# Altium PCB PCB.PcbDoc (part 1 of 3)
Units mm, origin at the board's own origin, x right, y up, seen from the top; angles counter-clockwise.
Board outline 224 x 132 mm, 4 copper layers (Top Layer, Signal Layer 1, Signal Layer 2, Bottom Layer), stack 0.778 mm thick; 181 components, 179 nets, 1018 pads, 539 vias.
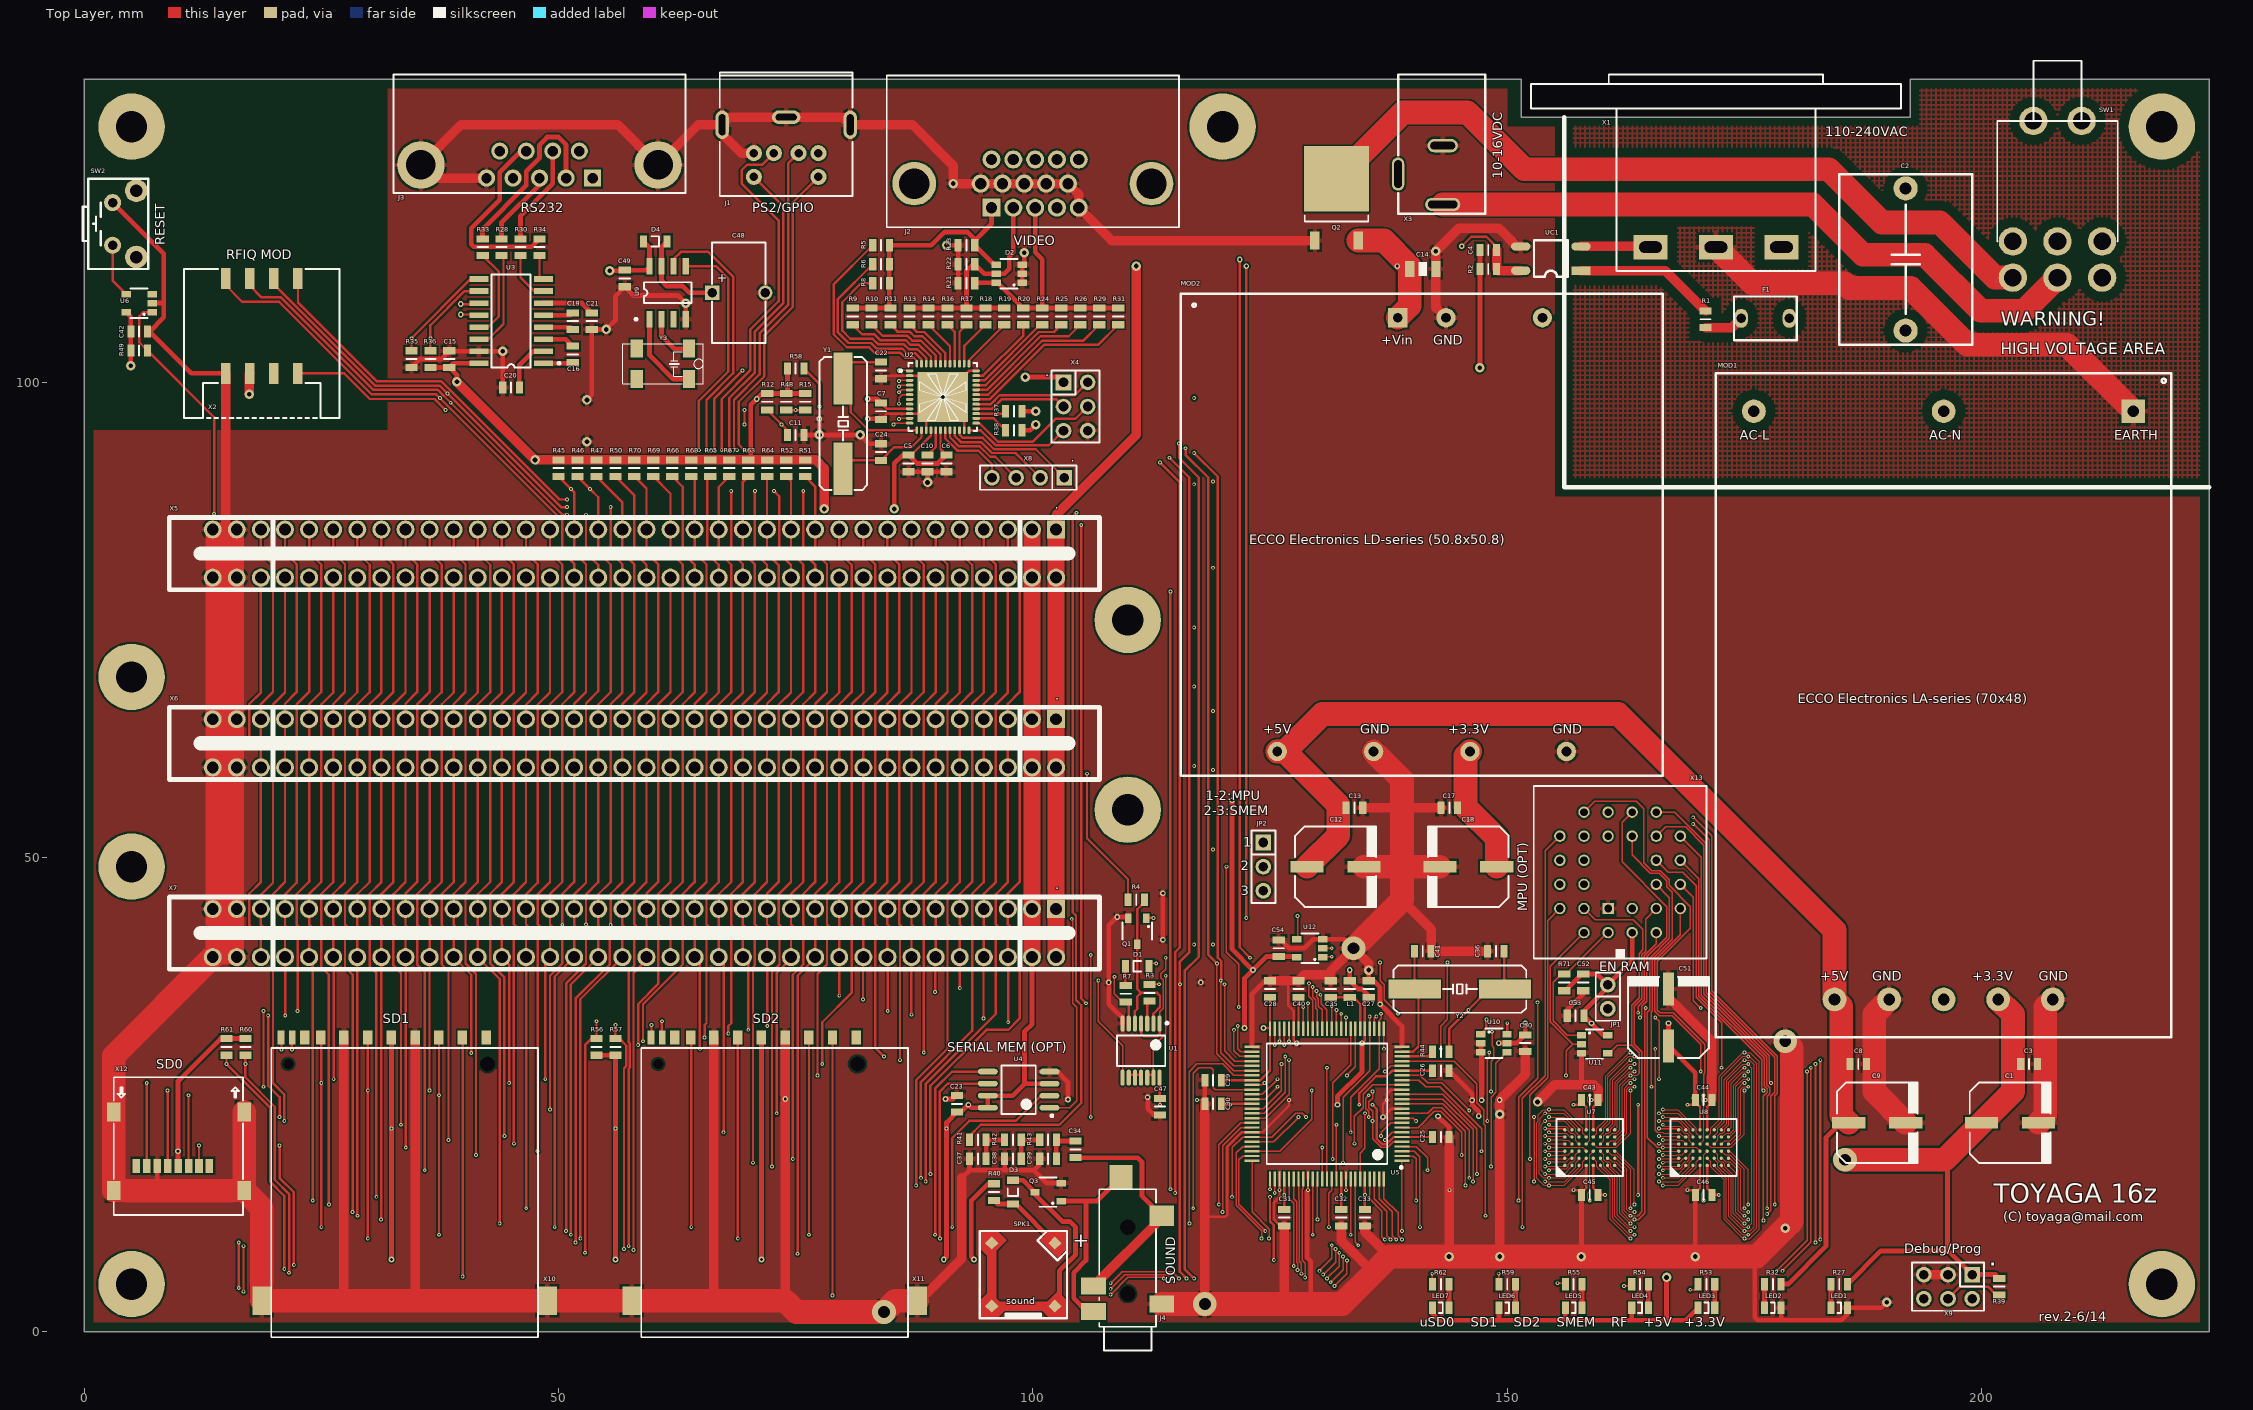
[diagram p0: Top Layer view]
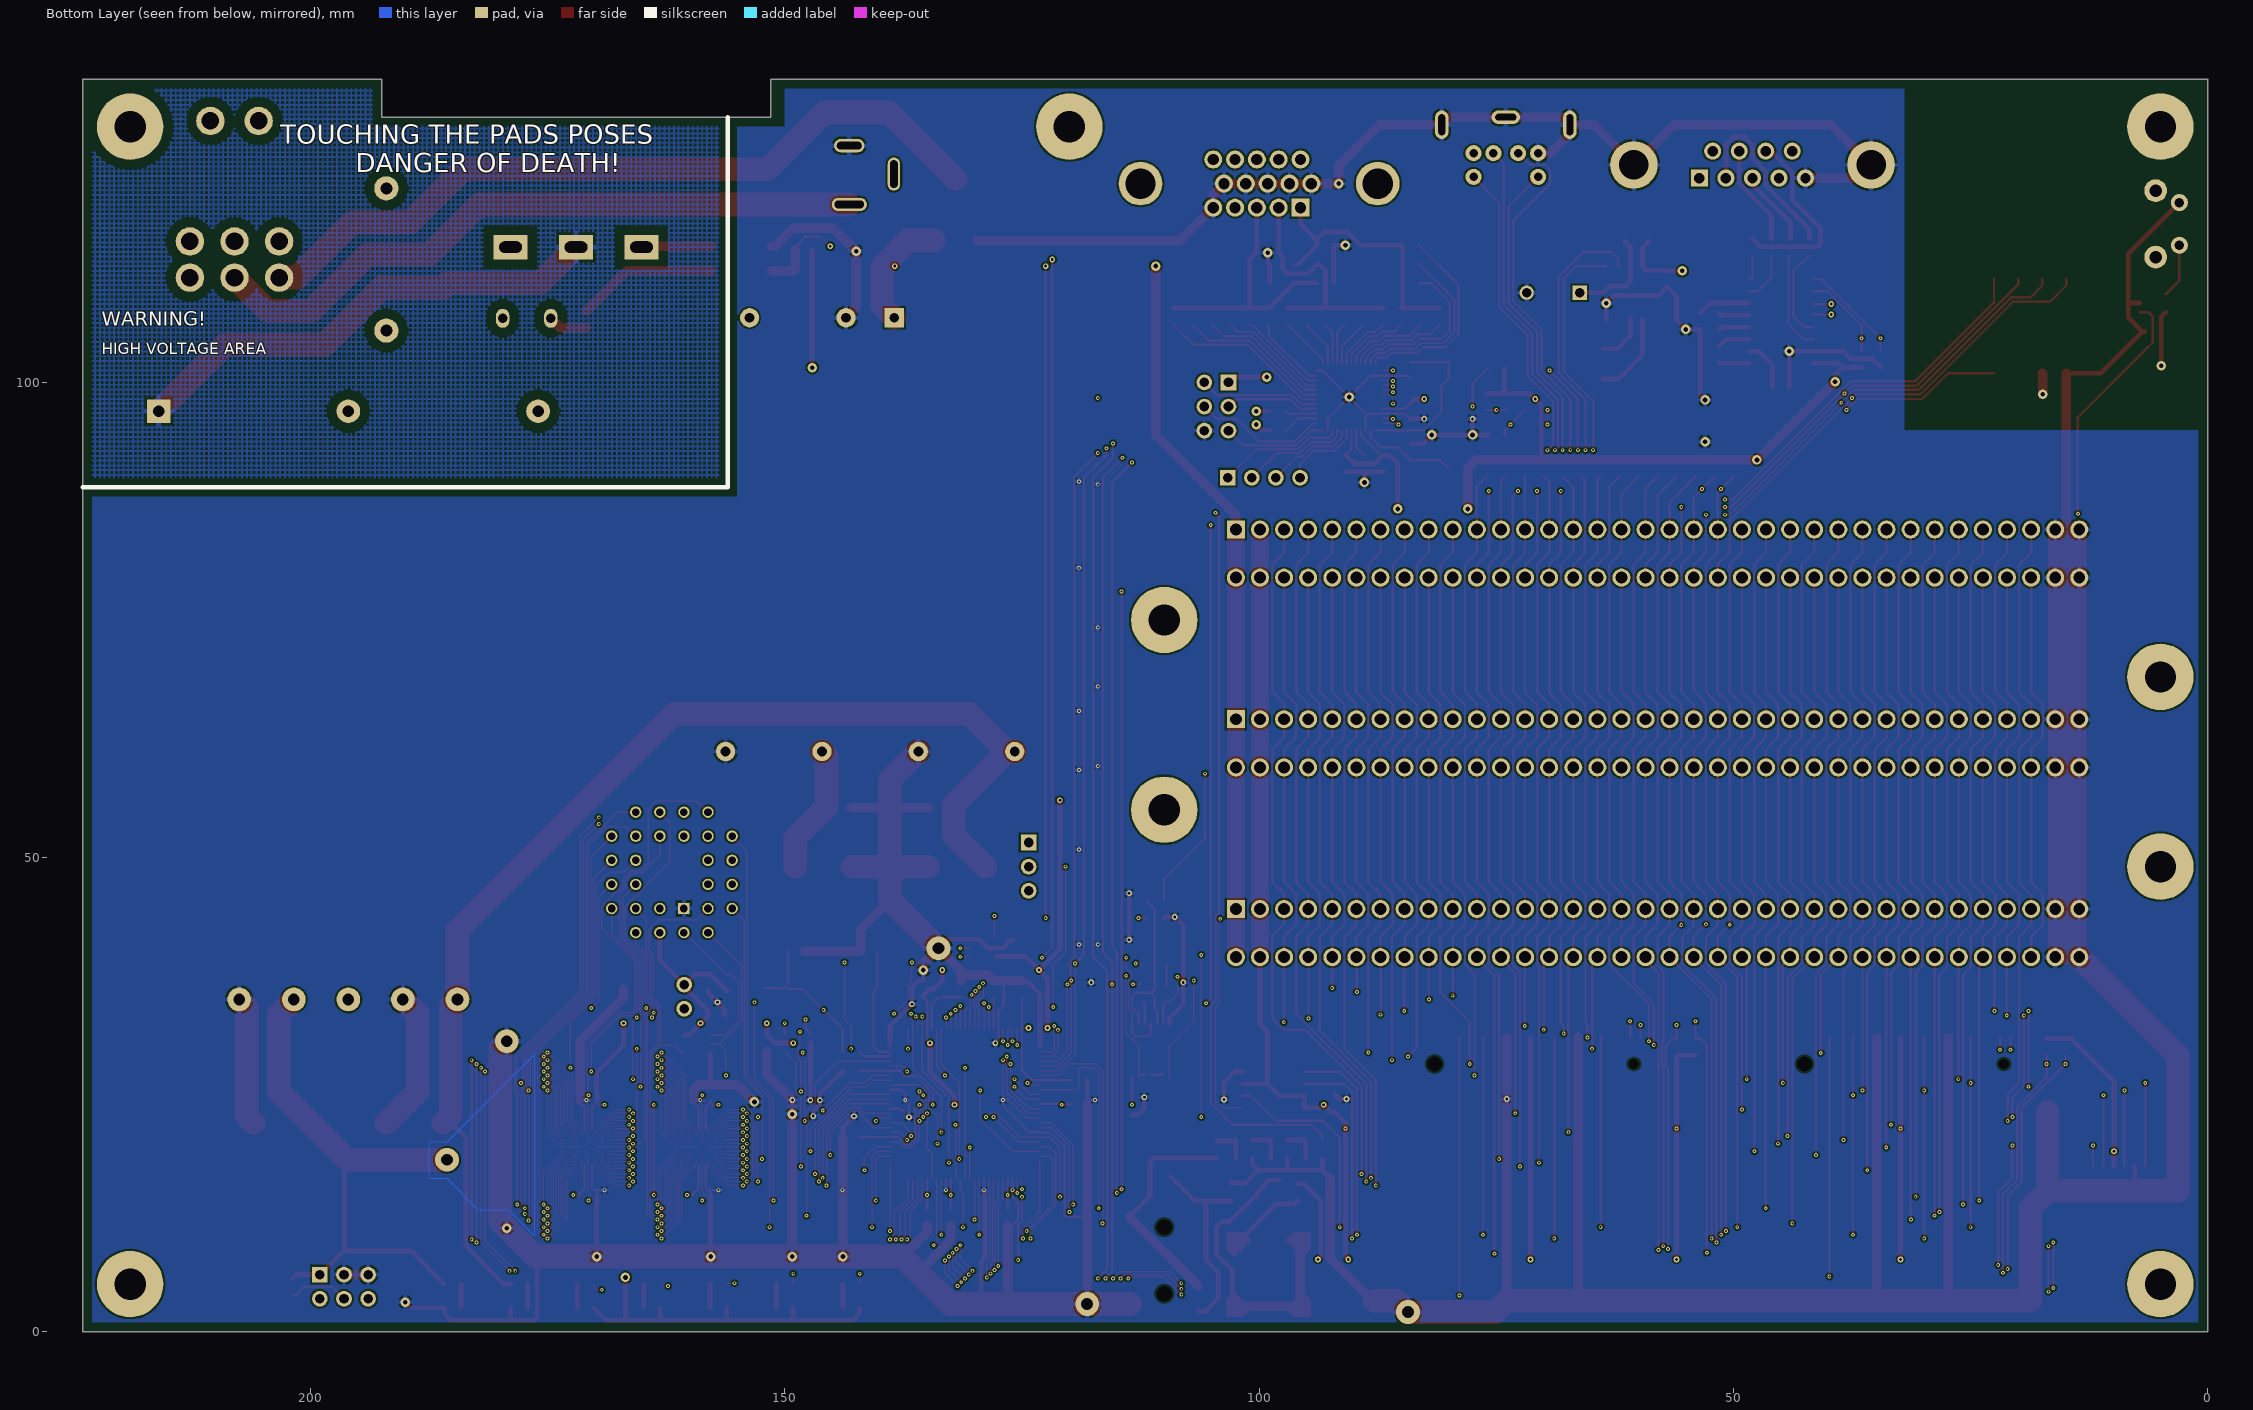
[diagram p1: Bottom Layer view, seen from below]
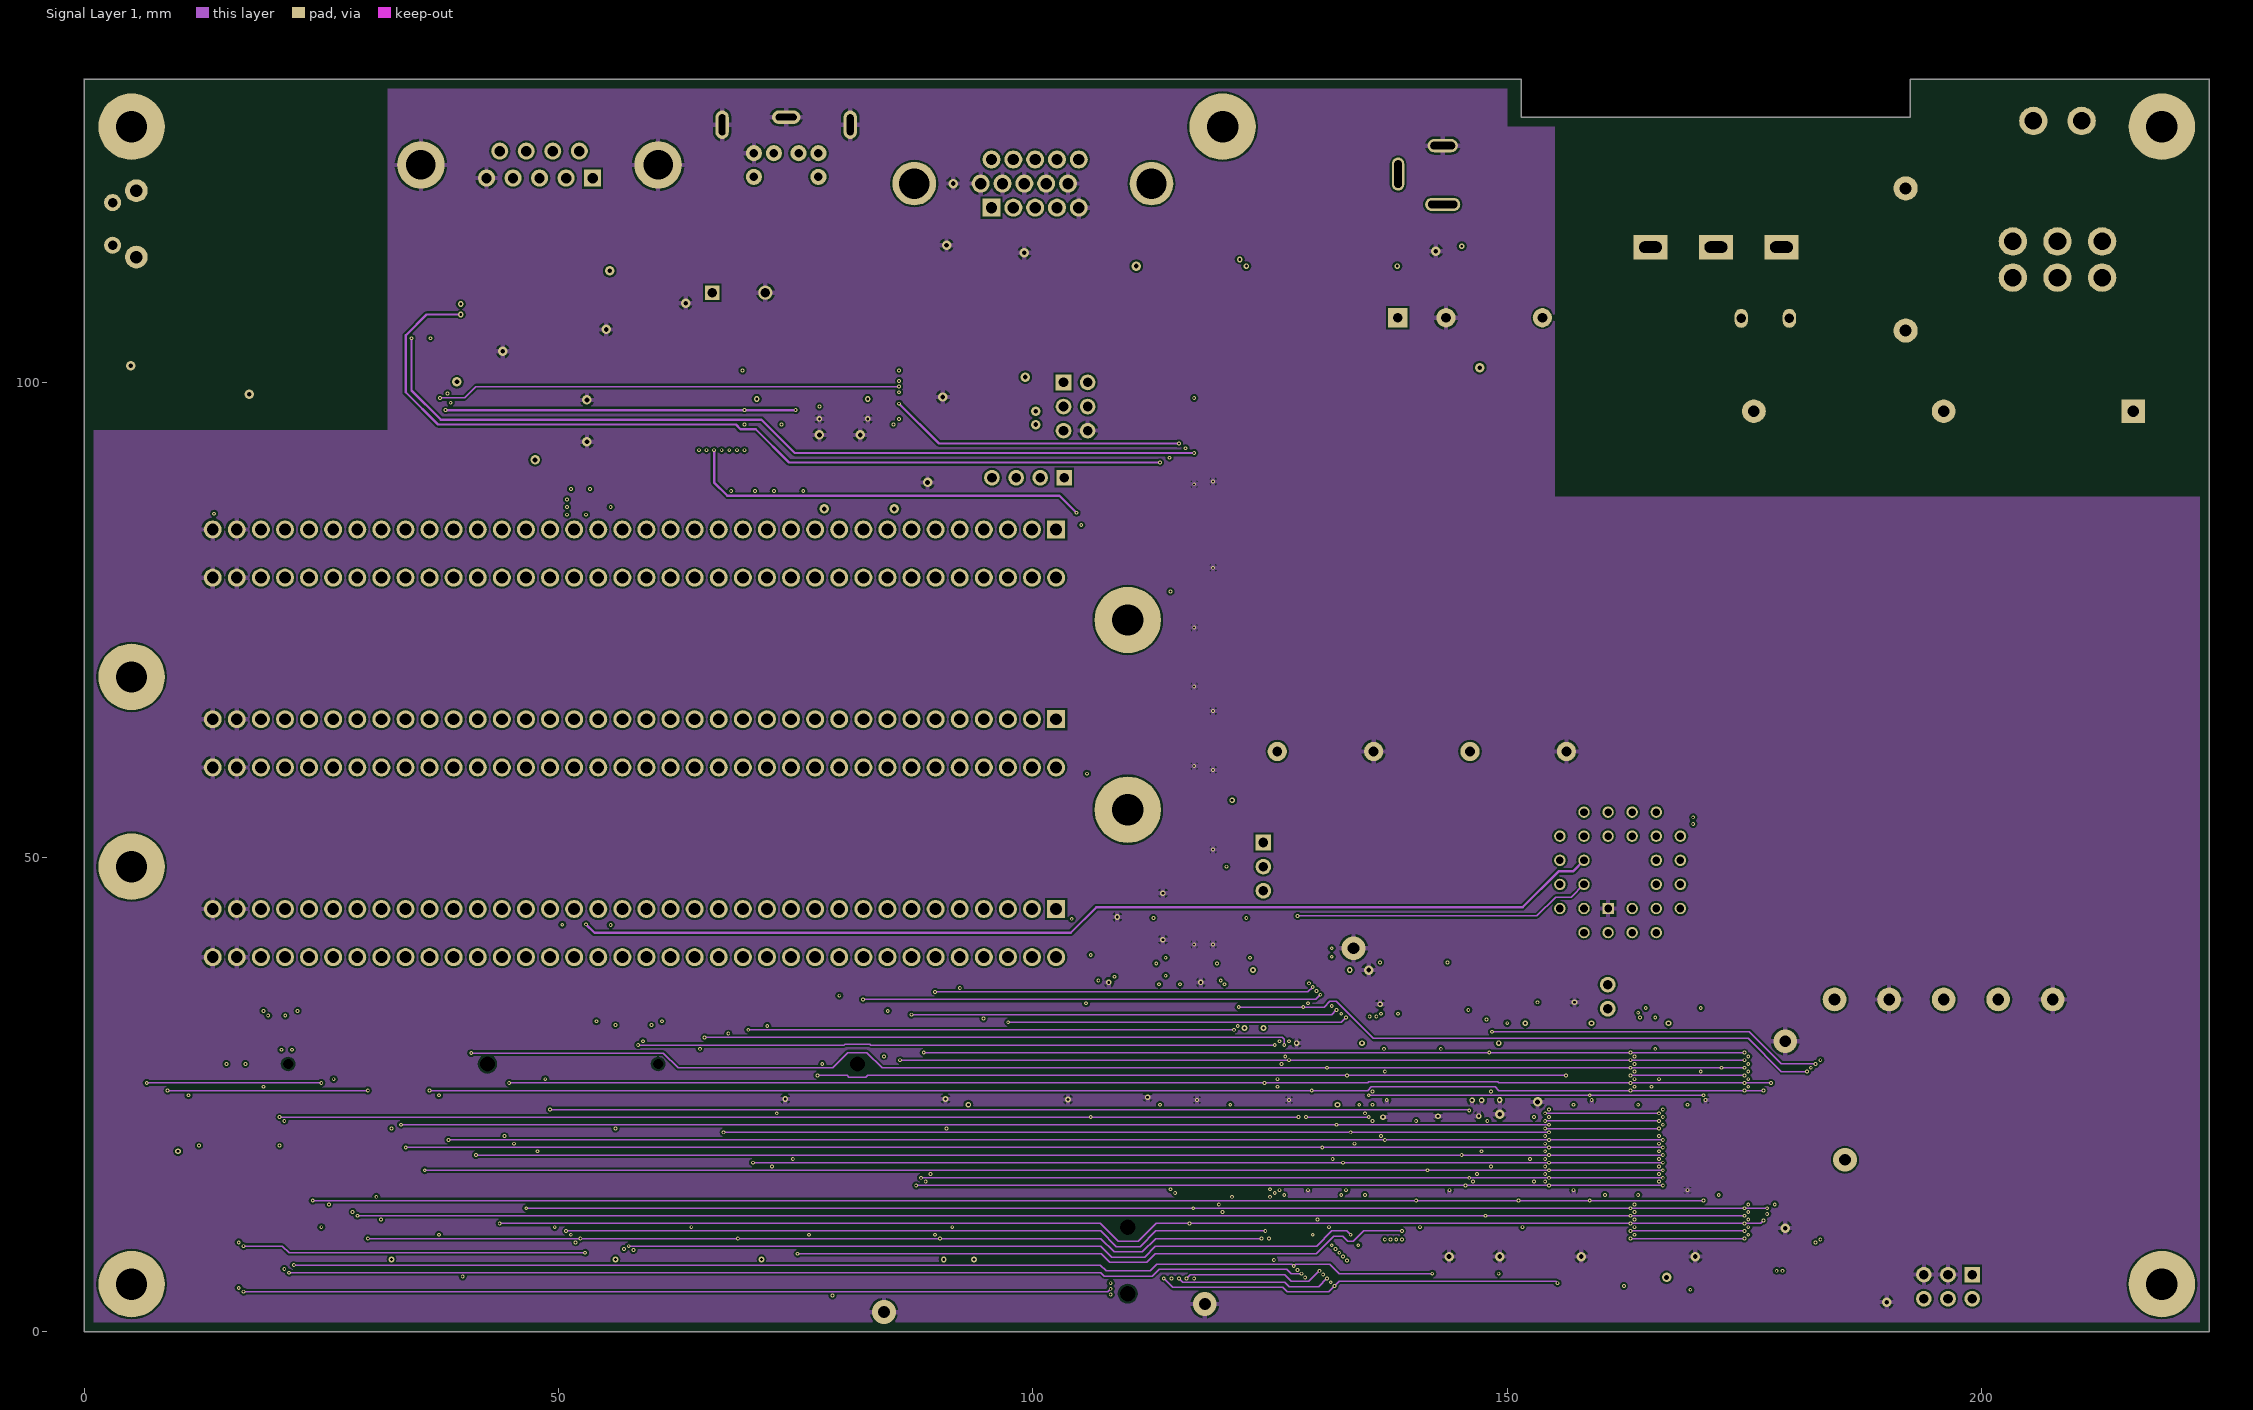
[diagram p2: Signal Layer 1]
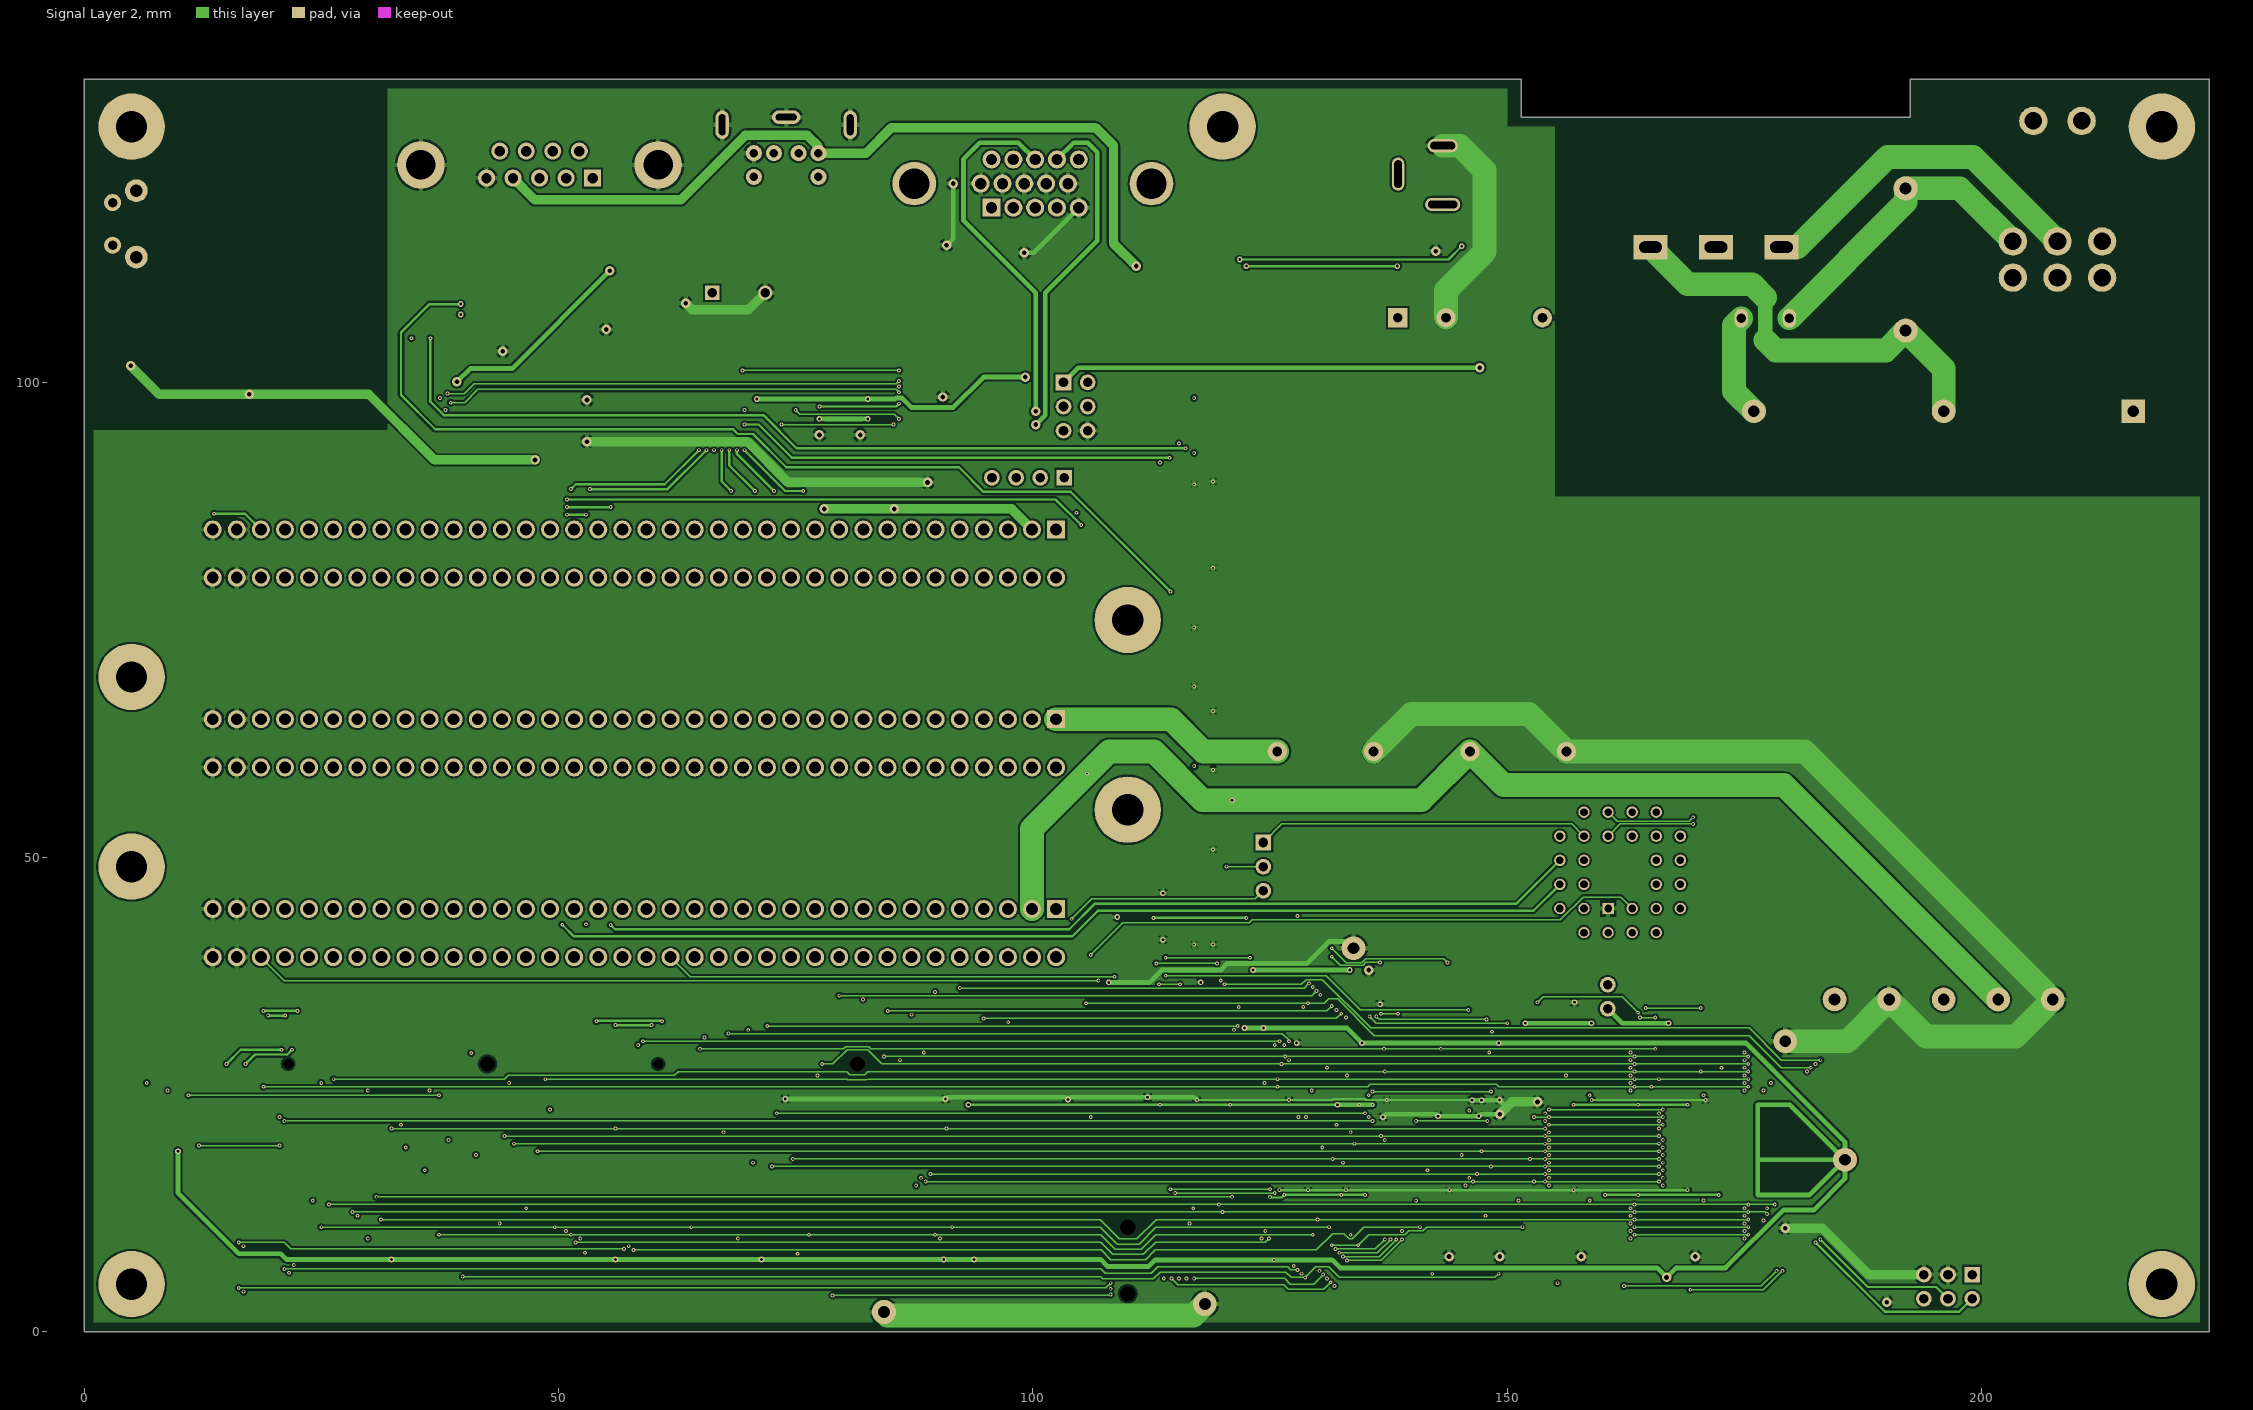
[diagram p3: Signal Layer 2]

## Layer stack, top to bottom
Top Layer: signal copper 0.0356
Dielectric: core 0.254, FR-4, Dk 4.2
Signal Layer 1: signal copper 0.036
Dielectric: prepreg 0.127, FR-4, Dk 4.2
Signal Layer 2: signal copper 0.036
Dielectric: core 0.254, FR-4, Dk 4.2
Bottom Layer: signal copper 0.0356

## Board outline
0,0 0,132 151.5,132 151.5,128 192.5,128 192.5,132 224,132 224,0

## Design rules (kind name [scope] priority, off if disabled: settings)
Clearance Clearance_POLY [IsRegion] p1: gap=0.2
Clearance Clearance_EARTH [InNet('EARTH')] p2: gap=1
Clearance [All] p3: gap=0.125
ComponentClearance [All] p1: gap=0.2 collisioncheckmode=3 verticalgap=0.25 showdistances=FALSE
Height [All] p1: minheight=0 maxheight=100 prefheight=2.5
HoleSize [All] p1: absolutevalues=TRUE maxlimit=25 minlimit=0.025 maxpercent=80.000 minpercent=20.000
HoleToHoleClearance [All] p1: gap=0 allowstackedmicrovias=TRUE
MinimumSolderMaskSliver [All] p1: minsoldermaskwidth=-100
NetAntennae [All] p1: netantennaetolerance=1
PlaneClearance [All] p1: clearance=0.5
PlaneConnect [All] p1: planeconnectstyle=Relief reliefexpansion=0.5 reliefentries=4 reliefconductorwidth=0.25 reliefairgap=0.25
PolygonConnect [All] p1: connectstyle=Relief reliefconductorwidth=0.5 reliefentries=4 polygonreliefangle="90 Angle" airgapwidth=0.25
RoutingVias [All] p1: holewidth=0.3 width=0.6 viastyle="Through Hole" minholewidth=0.15 minwidth=0.3 maxholewidth=2.5 maxwidth=5
SilkToSilkClearance [All] p1: silktosilkclearance=-100
SilkToSolderMaskClearance [IsPad] p1: minsilkscreentomaskgap=-100 clearancetoexposedcopper=TRUE
SolderMaskExpansion [All] p1: expansion=0.102
Width [All] p1: maxlimit=5 minlimit=0.125 preferedwidth=0.25
18 further rules are at their usual default settings.

## Classes and differential pairs
component class Schematic: C1 C2 C3 C4 C5 C6 C7 C8 C9 C10 C11 C12 C13 C14 C15 C16 C17 C18 C19 C20 C21 C22 C24 C25 C26 C27 C28 C29 C30 C31 C32 C33 C34 C35 C36 C37 C38 C39 C40 C41 C42 C43 C44 C45 C46 C47 C48 C49 C50 C51 D1 D2 D3 D4 F1 J1 J2 J3 J4 JP1 L1 LED1 LED2 LED3 LED4 LED5 LED6 LED7 MOD1 MOD2 Q1 Q2 Q3 R1 R2 R3 R4 R5 R6 R7 R8 R9 R10 R11 R12 R13 R14 R15 R16 R17 R18 R19 R20 R21 R22 R23 R24 R25 R26 R27 R28 R29 R30 R31 R32 R33 R34 R35 R36 R37 R38 R39 R40 R41 R42 R43 R44 R45 R46 R47 R48 R49 R50 R51 R52 R53 R54 R55 R56 R57 R58 R59 R60 R61 R62 R63 R64 R65 R66 R67 R68 R69 R70 SPK1 SW1 SW2 U1 U2 U3 U5 U6 U7 U8 U9 U10 UC1 X1 X3 X4 X5 X6 X7 X8 X9 X10 X11 X12 Y1 Y2 Y3
component class Additions: C23 C52 C53 C54 JP2 R71 U4 U11 U12 X2 X13

## Components (designator, comment, footprint, x,y, rotation, side; value= is the part's Value field where it differs from the comment)
C1 "470u/16V" "8.5 x 8.5" 203,22 r180 top locked
C2 "R46KI3330" X2_15MM 192,113 r270 top locked
C3 "100n" _0805 205,28.2 r180 top locked
C4 "4n7" _0805 148,114 r180 top locked
C5 "4u7" _0805 86.9,91.5 r270 top locked
C6 "4u7" _0805 90.9,91.5 r270 top locked
C7 "1u" _0805 84,97 r270 top locked
C8 "100n" _0805 187,28.2 r0 top locked
C9 "470u/16V" "8.5 x 8.5" 189,22 r180 top locked
C10 "4u7" _0805 88.9,91.5 r270 top locked
C11 "100n" _0805 75,94.5 r0 top locked
C12 "470u/16V" "8.5 x 8.5" 131.9,49 r180 top locked
C13 "100n" _0805 133.9,55.2 r0 top locked
C14 "1u/50V" _1206 141.1,112 r0 top
C15 "1u" _0805 38.5,102.5 r90 top locked
C16 "1u" _0805 51.5,103 r90 top locked
C17 "100n" _0805 143.9,55.2 r0 top locked
C18 "470u/16V" "8.5 x 8.5" 145.9,49 r0 top
C19 "1u" _0805 51.5,106.5 r270 top locked
C20 "1u" _0805 45,99.5 r0 top locked
C21 "1u" _0805 53.5,106.5 r90 top locked
C22 "27p" _0805 84,101.3 r270 top locked
C23 "100n" _0805 92,24 r90 top locked
C24 "27p" _0805 84,92.7 r90 top locked
C25 "100n" _0805 143,20.5 r180 top locked
C26 "100n" _0805 143,27.5 r180 top locked
C27 "100n" _0805 135.4,36.1 r270 top locked
C28 "100n" _0805 125,36.1 r270 top locked
C29 "100n" _0805 119,26.5 r0 top locked
C30 "100n" _0805 119,24 r0 top locked
C31 "100n" _0805 126.5,12 r90 top locked
C32 "100n" _0805 132.5,12 r90 top locked
C33 "100n" _0805 135,12 r90 top locked
C34 "470n" _0805 104.5,19.2 r270 top locked
C35 "1u" _0805 131.4,36.1 r270 top locked
C36 "18p" _0805 148.8,40.1 r180 top
C37 "4n7" _0805 94.2,18.2 r0 top locked
C38 "4n7" _0805 97.9,18.2 r0 top locked
C39 "4n7" _0805 101.6,18.2 r0 top locked
C40 "10u" _0805 128,36.1 r270 top locked
C41 "18p" _0805 141.1,40.1 r0 top
C42 "100n" _0805 5.8,105.4 r0 top locked
C43 "100n" _0805 158.7,24.4 r0 top locked
C44 "100n" _0805 170.7,24.4 r0 top locked
C45 "100n" _0805 158.7,14.4 r180 top locked
C46 "100n" _0805 170.7,14.4 r180 top locked
C47 "100n" _0805 113.4,23.7 r270 top
C48 "EECS0HD334V" "D10.5 x L5.5" 69,109.5 r0 top locked
C49 "100n" _0805 57,111 r270 top locked
C50 "100n" _0805 151.9,30.4 r90 top
C51 "470u/16V" "8.5 x 8.5" 167,33.1 r270 top locked
C52 "100n" _0805 158,36.8 r270 top
C53 "100n" _0805 157.2,33.3 r180 top
C54 "100n" _0805 125.9,40.4 r270 top
D1 "BAT54WS" "SOD-323 (MicroMELF)" 111,38.5 r0 top
D2 "BAS21VD" SOT23-6 97.5,111.5 r90 top locked
D3 "BAT54WS" "SOD-323 (MicroMELF)" 97.9,14.7 r90 top locked
D4 "RB751V40T1G" "SOD-323 (MicroMELF)" 60.2,114.9 r180 top locked
F1 "TRF600-150-2" "Fuse 5.1mm pitch" 177.2,106.8 r180 top locked
J1 "MD-60SM" MD-60SM 74,132.7 r0 top locked
J2 "TE1734530" "DB15F R/A VGA" 100,121 r180 top locked
J3 "DB9-M" "DB9M R/A" 48,123 r0 top locked
J4 "STX-3500-5N" STX-3500 110,0.5 r180 top locked
JP1 "SIL2-M" 2011-1X02S 160.6,35.3 r270 top
JP2 "Jumper 3" 2011-1X03S 124.3,49 r270 top
L1 "FR120R" _0805 133.4,36.1 r90 top locked
LED1 "0805GRN" _0805+ 185,2.5 r180 top locked
LED2 "0805GRN" _0805+ 178,2.5 r180 top locked
LED3 "0805BLU" _0805+ 171,2.5 r180 top locked
LED4 "0805YLW" _0805+ 164,2.5 r180 top locked
LED5 "0805YLW" _0805+ 157,2.5 r180 top
LED6 "0805YLW" _0805+ 150,2.5 r180 top
LED7 "0805RED" _0805+ 143,2.5 r180 top locked
MOD1 "LA25-220S3.3S05" "ECCO AC-DC (70x48)" 172,101 r270 top locked
MOD2 "LD25-12S05S3.3" "DC-DC (50.8x50.8)" 141,84 r270 top locked
Q1 "MMUN2233" SOT23-3 111,42.2 r180 top
Q2 "DMP4015SK3" TO252-3N 132,119.5 r90 top locked
Q3 "MMUN2233" SOT23-3 101.6,14.7 r90 top locked
R1 "470k" _0805 170.9,106.7 r90 top locked
R2 "100k" _0805 148,112 r180 top locked
R3 "10k" _0805 112.3,35.7 r90 top
R4 "100k" _0805 110.9,45.5 r0 top
R5 "15k" _0805 84,114.5 r0 top locked
R6 "8k2" _0805 84,112.5 r0 top locked
R7 "1k" _0805 109.8,35.6 r90 top
R8 "3k9" _0805 84,110.5 r0 top locked
R9 "2k" _0805 81,107 r90 top locked
R10 "1k" _0805 83,107 r90 top locked
R11 "470R" _0805 85,107 r90 top locked
R12 "10k" _0805 72,98 r270 top locked
R13 "15k" _0805 87,107 r90 top locked
R14 "8k2" _0805 89,107 r90 top locked
R15 "10k" _0805 76,98 r90 top locked
R16 "3k9" _0805 91,107 r90 top locked
R17 "2k" _0805 93,107 r90 top locked
R18 "1k" _0805 95,107 r90 top locked
R19 "470R" _0805 97,107 r90 top locked
R20 "15k" _0805 99,107 r90 top locked
R21 "75R" _0805 93,110.5 r0 top locked
R22 "75R" _0805 93,112.5 r0 top locked
R23 "75R" _0805 93,114.5 r0 top locked
R24 "8k2" _0805 101,107 r90 top locked
R25 "3k9" _0805 103,107 r90 top locked
R26 "2k" _0805 105,107 r90 top locked
R27 "510R" _0805 185,5 r0 top locked
R28 "330R" _0805 44,114.3 r90 top locked
R29 "1k" _0805 107,107 r90 top locked
R30 "330R" _0805 46,114.3 r90 top locked
R31 "470R" _0805 109,107 r90 top locked
R32 "820R" _0805 178,5 r0 top locked
R33 "330R" _0805 42,114.3 r90 top locked
R34 "330R" _0805 48,114.3 r90 top locked
R35 "100k" _0805 34.5,102.5 r90 top locked
R36 "100k" _0805 36.5,102.5 r90 top locked
R37 "1k" _0805 98,97 r0 top locked
R38 "1k" _0805 98,95 r0 top locked
R39 "10k" _0805 201.86,4.73 r270 top locked
R40 "33R" _0805 95.9,14.7 r90 top locked
R41 "1k" _0805 94.2,20.2 r0 top locked
R42 "1k" _0805 97.9,20.2 r0 top locked
R43 "1k" _0805 101.6,20.2 r0 top locked
R44 "20R" _0805 143,29.5 r0 top locked
R45 "10k" _0805 50,91 r90 top locked
R46 "10k" _0805 52,91 r90 top locked
R47 "10k" _0805 54,91 r90 top locked
R48 "10k" _0805 74,98 r90 top locked
R49 "100k" _0805 5.8,103.4 r180 top locked
R50 "10k" _0805 56,91 r90 top locked
R51 "10k" _0805 76,91 r90 top locked
R52 "10k" _0805 74,91 r90 top locked
R53 "510R" _0805 171,5 r0 top locked
R54 "510R" _0805 164,5 r0 top locked
R55 "510R" _0805 157,5 r0 top
R56 "100k" _0805 54,30 r270 top locked
R57 "100k" _0805 56,30 r270 top locked
R58 "10k" _0805 75,101.5 r180 top locked
R59 "510R" _0805 150,5 r0 top
R60 "100k" _0805 17,30 r90 top
R61 "100k" _0805 15,30 r90 top
R62 "510R" _0805 143,5 r0 top locked
R63 "10k" _0805 70,91 r90 top locked
R64 "10k" _0805 72,91 r90 top locked
R65 "10k" _0805 66,91 r90 top locked
R66 "10k" _0805 62,91 r90 top locked
R67 "10k" _0805 68,91 r90 top locked
R68 "10k" _0805 64,91 r90 top locked
R69 "10k" _0805 60,91 r90 top locked
R70 "10k" _0805 58,91 r90 top locked
R71 "100k" _0805 156,36.8 r270 top
SPK1 "SDR08540M3" SDR08540M3-01 99,6 r135 top locked
SW1 "E201MD1ABE" E201MD1ABE 208,127.6 r180 top locked
SW2 "SKHHLSA010" SKHH-HORIZONTAL 4.25,116.75 r270 top locked
U1 "SN74LVC00APW" TSOP65P640-14N 111.4,29.6 r270 top
U2 "FT800Q" QFN50P700X700-48W2N 90.5,98.5 r0 top locked
U3 "MAX3232D" SOIC16 45,106.5 r180 top locked
U4 "DNF" SOIC127P760-8N 98.5,25.5 r180 top locked
U5 "Z16F2811AL20EG" LQFP100 131,24 r180 top locked
U6 "MCP1319MT-29LE/OT" SOT23-5 5.8,108.4 r90 top locked
U7 "IS66WVE4M16BLL" BGA75P6X8-48 158.7,19.4 r90 top locked
U8 "IS66WVE4M16BLL" BGA75P6X8-48 170.7,19.4 r90 top locked
U9 "ISL12024IBZ" SOIC8 61.5,109.5 r0 top locked
U10 "SN74AUP1G57DBV" SOT23-6 148.6,30.4 r270 top
U11 "SN74AHC1G126DBV" SOT23-5 159.2,30.3 r270 top
U12 "SN74AHC1G08DBV" SOT23-5 129.2,40.4 r90 top
UC1 "LTV354T" SO4 154.6,113.1 r180 top locked
X1 "771W-AX2/01" 771W-AX2/01 172,114.3 r180 top locked
X2 "KON-SIM-01" KON-SIM-01 18.73,106 r180 top locked
X3 "PJ-002A" KLD-0202 138.5,132.5 r270 top locked
X4 "DNF" 2011-2X03S 104.5,97.5 r270 top locked
X5 "745-072-520-206" 745-072-520-206 58,82 r180 top locked
X6 "745-072-520-206" 745-072-520-206 58,62 r180 top locked
X7 "745-072-520-206" 745-072-520-206 58,42 r180 top locked
X8 "DNF" 2011-1X04S 99.5,90 r180 top locked
X9 "DIL6-M" 2011-2X03S 196.46,4.73 r180 top locked
X10 "SD-RSMT" SD-RSMT 33,31 r0 top locked
X11 "SD-RSMT" SD-RSMT 72,31 r0 top locked
X12 "47219-2001" MOLEX_47219-2001 10,19 r0 top locked
X13 "8428-11B1-RK-TP" "PLCC28-T/H socket" 161.9,48.4 r180 top locked
Y1 "ABLS-12.000MHZ" HC49/SMT 80,95.7 r90 top locked
Y2 "ABLS-18.432MHZ" HC49/SMT 145,36.1 r0 top locked
Y3 "CM200C-32.768KDZF-UT" "Crystal 79X37 (4)" 61,102 r180 top locked

## Footprints (in the part's own frame and the unit in brackets; to place one, negate y for a bottom-side part, rotate by r counter-clockwise, add the part's x,y. Pads: shape width x height; smd on the part's side, far side on the other; paste and mask are expansions set on the pad)
"8.5 x 8.5" [mm]
  rect 3.5x1.2 smd: 1(3,0) 2(-3,0)
  silkscreen extent -4.25,-4.25 4.25,4.25, body extent -4,-4 4,4, height 7
745-072-520-206 [mm] "72-pin board edge slot"
  rect 1.9x1.9 hole 1.25: 1(-44.45,-2.54)
  round 1.9 hole 1.25: 2(-44.45,2.54) 3(-41.91,-2.54) 4(-41.91,2.54) 5(-39.37,-2.54) 6(-39.37,2.54) 7(-36.83,-2.54) 8(-36.83,2.54) 9(-34.29,-2.54) 10(-34.29,2.54) 11(-31.75,-2.54) 12(-31.75,2.54) 13(-29.21,-2.54) 14(-29.21,2.54) 15(-26.67,-2.54) 16(-26.67,2.54) 17(-24.13,-2.54) 18(-24.13,2.54) 19(-21.59,-2.54) 20(-21.59,2.54) 21(-19.05,-2.54) 22(-19.05,2.54) 23(-16.51,-2.54) 24(-16.51,2.54) 25(-13.97,-2.54) 26(-13.97,2.54) 27(-11.43,-2.54) 28(-11.43,2.54) 29(-8.89,-2.54) 30(-8.89,2.54) 31(-6.35,-2.54) 32(-6.35,2.54) 33(-3.81,-2.54) 34(-3.81,2.54) 35(-1.27,-2.54) 36(-1.27,2.54) 37(1.27,-2.54) 38(1.27,2.54) 39(3.81,-2.54) 40(3.81,2.54) 41(6.35,-2.54) 42(6.35,2.54) 43(8.89,-2.54) 44(8.89,2.54) 45(11.43,-2.54) 46(11.43,2.54) 47(13.97,-2.54) 48(13.97,2.54) 49(16.51,-2.54) 50(16.51,2.54) 51(19.05,-2.54) 52(19.05,2.54) 53(21.59,-2.54) 54(21.59,2.54) 55(24.13,-2.54) 56(24.13,2.54) 57(26.67,-2.54) 58(26.67,2.54) 59(29.21,-2.54) 60(29.21,2.54) 61(31.75,-2.54) 62(31.75,2.54) 63(34.29,-2.54) 64(34.29,2.54) 65(36.83,-2.54) 66(36.83,2.54) 67(39.37,-2.54) 68(39.37,2.54) 69(41.91,-2.54) 70(41.91,2.54) 71(44.45,-2.54) 72(44.45,2.54)
  silkscreen extent -49.02,-3.81 49.02,3.81, body extent -49.02,-3.81 49.02,3.81, height 16.4
771W-AX2/01 [mm] "AC IEC connector"
  rect 3.6x2.6 hole 1.2 slot 2.4 at 0 deg: 1(-6.9,0) 2(0,0) 3(6.9,0)
  silkscreen extent -19.5,-18.2 19.5,2.5, body extent -19.5,-18.2 19.5,2.5, height 19
2011-1X02S [mil] "2011-1X02 Straight Pin Header"
  round 65 hole 40: 1(-50,0) 2(50,0)
  silkscreen extent -100,-50 100,50, body extent -100,-50 100,50, height 335
2011-1X03S [mil] "2011-1X03 Straight Pin Header"
  rect 65x65 hole 40: 1(-100,0)
  round 65 hole 40: 2(0,0) 3(100,0)
  silkscreen extent -150,-50 150,50, body extent -150,-50 150,50, height 335
2011-1X04S [mil] "2011-1X04 Straight Pin Header"
  rect 65x65 hole 40: 1(-150,0)
  round 65 hole 40: 2(-50,0) 3(50,0) 4(150,0)
  silkscreen extent -200,-50 200,50, body extent -200,-50 200,50, height 335
2011-2X03S [mil] "2011-2X03 Straight Pin Header"
  rect 65x65 hole 40: 1(-100,-50)
  round 65 hole 40: 2(-100,50) 3(0,-50) 4(0,50) 5(100,-50) 6(100,50)
  silkscreen extent -150,-100 150,100, body extent -150,-100 150,100, height 335
_0805 [mm]
  rect 0.75x1.3 smd: 1(-0.875,0) 2(0.875,0)
  silkscreen extent 0,-0.55 0,0.55, body extent -1.02,-0.65 1.02,0.65, height 0.85
_0805+ [mm]
  rect 0.75x1.3 smd: 1(-0.875,0) 2(0.875,0)
  silkscreen extent -0.2,-0.55 0.2,0.55, body extent -1.02,-0.65 1.02,0.65, height 0.85
_1206 [mm]
  rect 0.95x1.65 smd: 1(-1.375,0) 2(1.375,0)
  silkscreen extent -0.45,-0.72 0.45,0.73, body extent -1.62,-0.82 1.63,0.83, height 1
BGA75P6X8-48 [mm]
  round 0.35 smd: A1(-1.887,2.627) A2(-1.137,2.627) A3(-0.387,2.627) A4(0.363,2.627) A5(1.113,2.627) A6(1.863,2.627) B1(-1.887,1.877) B2(-1.137,1.877) B3(-0.387,1.877) B4(0.363,1.877) B5(1.113,1.877) B6(1.863,1.877) C1(-1.887,1.127) C2(-1.137,1.127) C3(-0.387,1.127) C4(0.363,1.127) C5(1.113,1.127) C6(1.863,1.127) D1(-1.887,0.377) D2(-1.137,0.377) D3(-0.387,0.377) D4(0.363,0.377) D5(1.113,0.377) D6(1.863,0.377) E1(-1.887,-0.373) E2(-1.137,-0.373) E3(-0.387,-0.373) E4(0.363,-0.373) E5(1.113,-0.373) E6(1.863,-0.373) F1(-1.887,-1.123) F2(-1.137,-1.123) F3(-0.387,-1.123) F4(0.363,-1.123) F5(1.113,-1.123) F6(1.863,-1.123) G1(-1.887,-1.873) G2(-1.137,-1.873) G3(-0.387,-1.873) G4(0.363,-1.873) G5(1.113,-1.873) G6(1.863,-1.873) H1(-1.887,-2.623) H2(-1.137,-2.623) H3(-0.387,-2.623) H4(0.363,-2.623) H5(1.113,-2.623) H6(1.863,-2.623)
  silkscreen extent -3.01,-3.5 2.99,3.5, body extent -3,-3.5 3,3.5, height 0.8
"Crystal 79X37 (4)" [mm] "Crystal 7.9 x 3.7 mm, 4 pins (often used for 32.768kHz)"
  rect 1.3x1.9 smd: 0(2.75,1.6) 0(2.75,-1.6) 1(-2.75,-1.6) 2(-2.75,1.6)
  silkscreen extent -4.25,-2.1 4.25,2.1, body extent -4.25,-2.1 4.25,2.1, height 2.4
"D10.5 x L5.5" [mm] "Cylindric capacitor"
  rect 1.5x1.5 hole 1: 1(-2.8,0)
  round 1.5 hole 1: 2(2.8,0)
  silkscreen extent -2.8,-5.3 2.8,5.3, body extent -3.2,-5.19 3.2,5.39, height 11.76
"DB9M R/A" [mm] "9 Pin Male D-Sub Right Angle, Through hole Mounting"
  round 5 hole 3.1: 0(-12.5,-0.03) 0(12.5,-0.03)
  rect 1.8x1.8 hole 1.1: 1(5.588,-1.42)
  round 1.8 hole 1.1: 2(2.794,-1.42) 3(0,-1.42) 4(-2.794,-1.42) 5(-5.588,-1.42) 6(4.191,1.42) 7(1.397,1.42) 8(-1.397,1.42) 9(-4.191,1.42)
  silkscreen extent -15.4,-3 15.4,9.49, body extent -15.4,-3 15.4,9.49, height 12.55
"DB15F R/A VGA" [mm] "DB15F-VGA connector (TE 1734530)"
  round 4.6 hole 3.2: 0(-12.5,0) 0(12.5,0)
  rect 1.9x1.9 hole 1.2: 1(4.36,2.54)
  round 1.9 hole 1.2: 2(2.06,2.54) 3(-0.24,2.54) 4(-2.54,2.54) 5(-4.84,2.54) 6(5.5,0) 7(3.2,0) 8(0.9,0) 9(-1.4,0) 10(-3.7,0) 11(4.36,-2.54) 12(2.06,-2.54) 13(-0.24,-2.54) 14(-2.54,-2.54) 15(-4.84,-2.54)
  silkscreen extent -15.4,-11.4 15.4,4.6, body extent -15.4,-17.4 15.4,4.6, height 12.5
"DC-DC (50.8x50.8)" [mil] "DC-DC converter"
  rect 80x80 hole 41: 1(-900,-100)
  round 80 hole 41: 2(-900,100) 3(-900,500) 4(900,600) 5(900,200) 6(900,-200) 7(900,-600)
  silkscreen extent -1000,-1000 1000,1000, body extent -1000,-1000 1000,1000, height 394
E201MD1ABE [mm] "E series toggle switch (horizontal)"
  round 3 hole 1.85: 0(-2.54,0) 0(2.54,0) 1(4.699,12.7) 2(0,12.7) 3(-4.699,12.7) 4(4.699,16.51) 5(0,16.51) 6(-4.699,16.51)
  silkscreen extent -6.35,-6.35 6.35,12.7, body extent -6.35,0 6.35,12.7, height 18
"ECCO AC-DC (70x48)" [mm] "AC/DC converter"
  rect 2.5x2.5 hole 1.22: 1(4,44)
  round 2.5 hole 1.22: 2(4,24) 3(4,4) 4(66,12.5) 5(66,18.25) 6(66,24) 7(66,29.75) 8(66,35.5)
  silkscreen extent 0,0 70,48, body extent 0,0 70,48, height 23.5
"Fuse 5.1mm pitch" [mm] "Resettable fuse 5.1mm pitch"
  oval 1.4x2 hole 1: 1(-2.54,0) 2(2.54,0)
  silkscreen extent -3.3,-2.3 3.3,2.3, body extent -3.3,-2.3 3.3,2.3, height 11
HC49/SMT [mm] "Standard HC49/SMT footprint"
  rect 5.5x2 smd: 1(-4.75,0) 2(4.75,0)
  silkscreen extent -7,-2.5 7,2.5, body extent -7,-2.5 7,2.5, height 3
KLD-0202 [mm] "KLD-0202-XX DC jack (RIGHT ANGLE)"
  oval 1.4x3.7 hole 0.8 slot 3.1 at 90 deg: 1(13.7,4.7)
  oval 1.4x3.2 hole 0.8 slot 2.6 at 90 deg: 2(7.5,4.7)
  oval 3.5x1.3 hole 0.8 slot 2.9 at 0 deg: 3(10.5,0)
  silkscreen extent 0,0 14.7,9.2, body extent 0,0 14.75,9.2, height 9.16
KON-SIM-01 [mm] "Open SIM connector"
  rect 1x2.2 smd: C1(-3.81,5) C2(-1.27,5) C3(1.27,5) C4(3.81,5) C5(-3.81,-5) C6(-1.27,-5) C7(1.27,-5) C8(3.81,-5)
  silkscreen extent -8.2,-6 8.2,9.7, body extent -8.2,-15.8 8.2,9.7, height 3
LQFP100 [mm] "0.5mm Pitch LQFP100 Package"
  rect 1.55x0.25 smd: 1(-7.9,6) 2(-7.9,5.5) 3(-7.9,5) 4(-7.9,4.5) 5(-7.9,4) 6(-7.9,3.5) 7(-7.9,3) 8(-7.9,2.5) 9(-7.9,2) 10(-7.9,1.5) 11(-7.9,1) 12(-7.9,0.5) 13(-7.9,0) 14(-7.9,-0.5) 15(-7.9,-1) 16(-7.9,-1.5) 17(-7.9,-2) 18(-7.9,-2.5) 19(-7.9,-3) 20(-7.9,-3.5) 21(-7.9,-4) 22(-7.9,-4.5) 23(-7.9,-5) 24(-7.9,-5.5) 25(-7.9,-6) 51(7.9,-6) 52(7.9,-5.5) 53(7.9,-5) 54(7.9,-4.5) 55(7.9,-4) 56(7.9,-3.5) 57(7.9,-3) 58(7.9,-2.5) 59(7.9,-2) 60(7.9,-1.5) 61(7.9,-1) 62(7.9,-0.5) 63(7.9,0) 64(7.9,0.5) 65(7.9,1) 66(7.9,1.5) 67(7.9,2) 68(7.9,2.5) 69(7.9,3) 70(7.9,3.5) 71(7.9,4) 72(7.9,4.5) 73(7.9,5) 74(7.9,5.5) 75(7.9,6)
  rect 0.25x1.55 smd: 26(-6,-7.9) 27(-5.5,-7.9) 28(-5,-7.9) 29(-4.5,-7.9) 30(-4,-7.9) 31(-3.5,-7.9) 32(-3,-7.9) 33(-2.5,-7.9) 34(-2,-7.9) 35(-1.5,-7.9) 36(-1,-7.9) 37(-0.5,-7.9) 38(0,-7.9) 39(0.5,-7.9) 40(1,-7.9) 41(1.5,-7.9) 42(2,-7.9) 43(2.5,-7.9) 44(3,-7.9) 45(3.5,-7.9) 46(4,-7.9) 47(4.5,-7.9) 48(5,-7.9) 49(5.5,-7.9) 50(6,-7.9) 76(6,7.925) 77(5.5,7.925) 78(5,7.925) 79(4.5,7.925) 80(4,7.925) 81(3.5,7.925) 82(3,7.925) 83(2.5,7.925) 84(2,7.925) 85(1.5,7.925) 86(1,7.925) 87(0.5,7.925) 88(0,7.925) 89(-0.5,7.925) 90(-1,7.925) 91(-1.5,7.925) 92(-2,7.925) 93(-2.5,7.925) 94(-3,7.925) 95(-3.5,7.925) 96(-4,7.925) 97(-4.5,7.925) 98(-5,7.925) 99(-5.5,7.925) 100(-6,7.925)
  silkscreen extent -7.95,-6.35 6.35,6.82, body extent -7,-7 7,7, height 1.6
MD-60SM [mm] "6-pin mini-DIN connector (female) PS/2"
  oval 1.4x3 hole 0.7 slot 2.2 at 90 deg: 0(-6.75,-5.5) 0(6.75,-5.5)
  oval 3x1.4 hole 0.7 slot 2.2 at 0 deg: 0(0,-4.7)
  round 1.7 hole 0.9: 1(-1.3,-8.5) 2(1.3,-8.5) 3(-3.4,-8.5) 4(3.4,-8.5) 5(-3.4,-11) 6(3.4,-11)
  silkscreen extent -7,-13 7,0, body extent -7,-13 7,0, height 12.8
MOLEX_47219-2001 [mm] "microSD connector (hinge lid type)"
  rect 1.45x2 smd: 0(-6.875,-4.15) 0(-6.875,4.15) 0(6.875,-4.15) 0(6.875,4.15)
  rect 0.8x1.5 smd: 1(3.205,-1.55) 2(2.105,-1.55) 3(1.005,-1.55) 4(-0.095,-1.55) 5(-1.195,-1.55) 6(-2.295,-1.55) 7(-3.395,-1.55) 8(-4.495,-1.55)
  silkscreen extent -6.87,-6.7 6.72,7.8, body extent -6.9,-6.7 6.7,7.8, height 1.9
"PLCC28-T/H socket" [mm] "8428-11B1-RK-TP"
  rect 1.2x1.2 hole 0.8: 1(1.27,3.81)
  round 1.2 hole 0.8: 2(-1.27,6.35) 3(-1.27,3.81) 4(-3.81,6.35) 5(-6.35,3.81) 6(-3.81,3.81) 7(-6.35,1.27) 8(-3.81,1.27) 9(-6.35,-1.27) 10(-3.81,-1.27) 11(-6.35,-3.81) 12(-3.81,-6.35) 13(-3.81,-3.81) 14(-1.27,-6.35) 15(-1.27,-3.81) 16(1.27,-6.35) 17(1.27,-3.81) 18(3.81,-6.35) 19(6.35,-3.81) 20(3.81,-3.81) 21(6.35,-1.27) 22(3.81,-1.27) 23(6.35,1.27) 24(3.81,1.27) 25(6.35,3.81) 26(3.81,6.35) 27(3.81,3.81) 28(1.27,6.35)
  silkscreen extent -9.1,-9.1 9.1,9.1, body extent -9.1,-9.1 9.1,9.1, height 8
QFN50P700X700-48W2N [mm]
  oval 0.8x0.3 smd: 1(-3.488,2.754) 2(-3.488,2.254) 3(-3.488,1.754) 4(-3.488,1.254) 5(-3.488,0.754) 6(-3.488,0.254) 7(-3.488,-0.246) 8(-3.488,-0.746) 9(-3.488,-1.246) 10(-3.488,-1.746) 11(-3.488,-2.246) 12(-3.488,-2.746) 25(3.512,-2.746) 26(3.512,-2.246) 27(3.512,-1.746) 28(3.512,-1.246) 29(3.512,-0.746) 30(3.512,-0.246) 31(3.512,0.254) 32(3.512,0.754) 33(3.512,1.254) 34(3.512,1.754) 35(3.512,2.254) 36(3.512,2.754)
  oval 0.3x0.8 smd: 13(-2.738,-3.496) 14(-2.238,-3.496) 15(-1.738,-3.496) 16(-1.238,-3.496) 17(-0.738,-3.496) 18(-0.238,-3.496) 19(0.262,-3.496) 20(0.762,-3.496) 21(1.262,-3.496) 22(1.762,-3.496) 23(2.262,-3.496) 24(2.762,-3.496) 37(2.762,3.504) 38(2.262,3.504) 39(1.762,3.504) 40(1.262,3.504) 41(0.762,3.504) 42(0.262,3.504) 43(-0.238,3.504) 44(-0.738,3.504) 45(-1.238,3.504) 46(-1.738,3.504) 47(-2.238,3.504) 48(-2.738,3.504)
  rect 5.3x5.3 smd: 49(0.012,0.004)
  silkscreen extent -4.56,-3.6 3.61,3.6, body extent -3.57,-3.58 3.59,3.58, height 0.8
SD-RSMT [mm] "3M: SD card push-push connector"
  rect 2x3 smd: 0(-14.28,-27.75) 0(15.82,-27.75)
  rect 0x0 hole 1.1: 0(-11.5,-2.8)
  rect 0x0 hole 1.6: 0(9.5,-2.8)
  rect 1x1.5 smd: 1(6.88,0) 2(4.38,0) 3(1.88,0) 4(-0.62,0) 5(-3.12,0) 6(-5.62,0) 7(-8.05,0) 8(-9.75,0) 9(9.38,0)
  rect 0.7x1.5 smd: DET(-11.05,0) WP(-12.25,0)
  silkscreen extent -13.28,-31.6 14.82,-1.1, body extent -13.3,-36.6 14.9,-1.1, height 3
SDR08540M3-01 [mm] "TDK: Electromagnetic Buzzers SMD Terminal SDR Series"
  rect 1x1 smd: 1(0,-4.7) 2(-4.7,0) 2(0,4.7) 2(4.7,0)
  Top Layer region: 6.3,0 5,1.3 3.8,1.3 3.8,-1.3 5,-1.3
  Top Layer region: 0,6.3 -1.3,5 -1.3,3.8 1.3,3.8 1.3,5
  Top Layer region: -6.3,0 -5,-1.3 -3.8,-1.3 -3.8,1.3 -5,1.3
  Top Layer region: 0,-6.3 1.3,-5 1.3,-3.8 -1.3,-3.8 -1.3,-5
  silkscreen extent -6.5,-6.5 6.5,6.5, body extent -6.5,-6.5 6.5,6.5, height 4
SKHH-HORIZONTAL [mm] "ALPS SKHH series horizontal tactile switch 6x6x4.3mm"
  round 2.4 hole 1.3: 0(-3.5,1.25) 0(3.5,1.25)
  round 1.8 hole 1: 1(-2.25,-1.25) 2(2.25,-1.25)
  silkscreen extent -4.75,-4.4 4.75,2.5, body extent -4.8,-4.5 4.8,2.5, height 7
SO4 [mil] "2.54mm pitch; 4.4mm body"
  rect 80x35 smd: 1(-125,50)
  oval 80x35 smd: 2(-125,-50) 3(125,-50) 4(125,50)
  silkscreen extent -70,-75 70,75, body extent -98,-79 98,79, height 55
"SOD-323 (MicroMELF)" [mm]
  rect 0.75x1.3 smd: 1(-1.25,0) 2(1.25,0)
  silkscreen extent -0.4,-0.55 0.4,0.55, body extent -1.25,-0.65 1.25,0.65, height 0.85
SOIC8 [mm] "SOIC8 Package"
  rect 0.65x1.75 smd: 1(-1.905,-2.8) 2(-0.635,-2.8) 3(0.635,-2.8) 4(1.905,-2.8) 5(1.905,2.8) 6(0.635,2.8) 7(-0.635,2.8) 8(-1.905,2.8)
  silkscreen extent -3.45,-2.92 2.5,1.1, body extent -2.5,-2 2.5,2, height 1.75
SOIC16 [mm] "SOIC16 Package"
  rect 2x0.6 smd: 1(-3.4,4.45) 2(-3.4,3.18) 3(-3.4,1.91) 4(-3.4,0.64) 5(-3.4,-0.63) 6(-3.4,-1.9) 7(-3.4,-3.17) 8(-3.4,-4.44) 9(3.4,-4.44) 10(3.4,-3.17) 11(3.4,-1.9) 12(3.4,-0.63) 13(3.4,0.64) 14(3.4,1.91) 15(3.4,3.18) 16(3.4,4.45)
  silkscreen extent -5.17,-4.9 2.05,4.9, body extent -2.5,-5 2.5,5, height 1.04
SOIC127P760-8N [mm]
  oval 2.1x0.6 smd: 1(-3.252,1.91) 2(-3.252,0.64) 3(-3.252,-0.63) 4(-3.252,-1.9) 5(3.248,-1.9) 6(3.248,-0.63) 7(3.248,0.64) 8(3.248,1.91)
  silkscreen extent -3.63,-2.54 1.8,2.88, body extent -2.85,-2.54 2.85,2.56, height 1.4
SOT23-3 [mm] "SOT23-3 Package"
  rect 0.69x0.99 smd: 1(-0.95,-1.375) 2(0.95,-1.375) 3(0,1.375)
  silkscreen extent -1.55,-0.9 1.55,0.9, body extent -1.55,-0.9 1.55,0.9, height 1.3
SOT23-5 [mm] "SOT23-5 Package"
  rect 0.69x0.99 smd: 1(-0.95,-1.375) 2(0,-1.375) 3(0.95,-1.375) 4(0.95,1.375) 5(-0.95,1.375)
  silkscreen extent -1.55,-0.9 1.55,0.9, body extent -1.55,-0.9 1.55,0.9, height 1.3
SOT23-6 [mm] "SOT23-6 Package"
  rect 0.69x0.99 smd: 1(-0.95,-1.375) 2(0,-1.375) 3(0.95,-1.375) 4(0.95,1.375) 5(0,1.375) 6(-0.95,1.375)
  silkscreen extent -1.55,-0.9 1.55,0.9, body extent -1.55,-0.9 1.55,0.9, height 1.3
STX-3500 [mm] "3.5mm stereo audio jack"
  rect 0x0 hole 1.65 unplated: 0(0,-3.5) 0(0,-10.5)
  rect 2.6x1.8 smd: 1(-3.6,-2.4) 3(3.6,-4.3) 5(3.6,-1.6)
  rect 2.6x2.2 smd: 2(-3.6,-11.7)
  rect 2.4x2.5 smd: 4(0.7,-15.8)
  silkscreen extent -3,-14.5 3,2.5, body extent -3,-14.5 3,2.5, height 4.98
TO252-3N [mm]
  rect 1.9x1 smd: 1(-4.51,2.275) 2(-4.51,-2.285)
  rect 6.9x6.8 smd: 3(1.99,-0.005)
  silkscreen extent -2.51,-3.36 -1.86,3.34, body extent -3.9,-3.4 3.69,3.34, height 1.6
TSOP65P640-14N [mm]
  oval 1.7x0.45 smd: 1(-2.859,1.955) 2(-2.859,1.305) 3(-2.859,0.655) 4(-2.859,0.005) 5(-2.859,-0.645) 6(-2.859,-1.295) 7(-2.859,-1.945) 8(2.841,-1.945) 9(2.841,-1.295) 10(2.841,-0.645) 11(2.841,0.005) 12(2.841,0.655) 13(2.841,1.305) 14(2.841,1.955)
  silkscreen extent -3.03,-2.55 1.59,2.86, body extent -2.26,-2.54 2.24,2.56, height 0.8
X2_15MM [mm]
  round 2.54 hole 1.27: 1(-7.5,0) 2(7.5,0)
  silkscreen extent -9,-7 9,7, body extent -9,-7 9,7, height 14.4

## Part data
C1 C9 C12 C18 C48 C51: library part Capacitor+, "Polar capacitor"
C2 C3 C4 C5 C6 C7 C8 C10 C11 C13 C14 C15 C16 C17 C19 C20 C21 C22 C23 C24 C25 C26 C27 C28 C29 C30 C31 C32 C33 C34 C35 C36 C37 C38 C39 C40 C41 C42 C43 C44 C45 C46 C47 C49 C50 C52 C53 C54: library part Capacitor, "Capacitor"
D1 D3 D4: library part "Diode Schottky", "Schottky diode"
D2: library part "Diode Triple", "Diode (triple)"
F1: library part "Fuse Resettable"
J1: "6-pin mini-DIN connector (female) PS/2"
J2: library part "DB15 (3 rows)", "DB15 (3 rows) connector R/A"
J3: library part DB9, "DB9 connector"
J4: library part "Phono Jack Stereo (switchless)", "Phono Jack (stereo)"
JP1: library part "Jumper 2", "2.54mm square pin header/jumper"
JP2: "2.54mm square pin header/jumper"
L1: library part Inductor, "Inductor"
LED1 LED2 LED3 LED4 LED5 LED6 LED7: library part LED, "Light Emitting Diode"
MOD1: library part "ECCO AC-DC dual", "Miniature AC/DC module"
MOD2: library part "ECCO DC-DC dual", "DC-DC converter isolated output with common ground and control"
Q1 Q3: library part "NPN BIASED", "NPN biased bipolar transistor"
Q2: library part P-FET, "P-channel FET transistor"
R1 R2 R3 R4 R5 R6 R7 R8 R9 R10 R11 R12 R13 R14 R15 R16 R17 R18 R19 R20 R21 R22 R23 R24 R25 R26 R27 R28 R29 R30 R31 R32 R33 R34 R35 R36 R37 R38 R39 R40 R41 R42 R43 R44 R45 R46 R47 R48 R49 R50 R51 R52 R53 R54 R55 R56 R57 R58 R59 R60 R61 R62 R63 R64 R65 R66 R67 R68 R69 R70 R71: library part Resistor, "Resistor"
SPK1: library part Speaker, "Speaker/Buzzer"
SW1: library part "Switch DPDT", "Switch"
SW2: library part "Switch MNO SPST", "Switch, Momentary, Normal Open"
U1: library part 74xxx00, "Quad NAND"
U2: "Embedded Video Engine"
U3: library part MAX232, "Dual EIA-232 drivers"
U4: library part "SPI Flash 8pin", "Standard 8-pin SPI flash memory"
U5: library part "Z16F (QFP100)", "16-bit microcontroller/microprocessor"
U6: library part MCP1319, "Voltage Supervisor"
U7 U8: library part "IS66WVE4M16 BGA", "4M x 16 high speed asynchronous pseudostatic RAM"
U9: library part ISL12024, "Real-Time Clock/Calendar with Embedded  Unique ID"
U10: library part SN74AUP1G57, "Universal logic element"
U11: library part SN74xxx1G126, "Buffer gate with non-invertinng Enable input"
U12: library part SN74xxx1G08, "2-INPUT AND GATE"
UC1: library part "OPTO AC", "Optocoupler AC"
X1: library part "Connector 1x3", "Single row, 3-way connector"
X2: library part "SIM/microSIM (8-pin)", "SIM/microSIM 6-pin connector"
X3: library part "Power Jack 2.5", "Power Jack 2.1mm or 2.5mm"
X4 X9: library part "Connector 2x3", "Dual row, 6-way connector"
X5 X6 X7: library part "Connector 2x36", "Dual row, 72-way connector"
X8: library part "Connector 1x4", "Single row, 4-way connector"
X10 X11: library part "SD (w/ card detect and WP)", "SD card connector"
X12: library part microSD, "microSD card connector"
X13: library part "PLCC28 socket", "PLCC28 T/H socket"
Y1 Y2 Y3: library part Crystal, "Crystal Resonator"

## Free pads (board coordinates)
  round 7 hole 3.3: 0(5,5) 0(5,49) 0(5,69) 0(5,127) 0(110,55) 0(110,75) 0(120,127) 0(219,5) 0(219,127)

## Via types
v1: diameter 0.4, hole 0.2, Top Layer to Bottom Layer, tented both sides, 453 vias
v2: diameter 0.6, hole 0.3, Top Layer to Bottom Layer, tented both sides, 46 vias
v3: diameter 1, hole 0.5, Top Layer to Bottom Layer, tented both sides, 34 vias
v4: diameter 2.5, hole 1.25, Top Layer to Bottom Layer, tented both sides, 5 vias
v5: diameter 1, hole 0.5, Top Layer to Bottom Layer, tented bottom, 1 vias

## Nets (pads, with @x,y where several pads share a name; then routed paths per layer and width w, separated by ;. In a path a pad name is that pad's centre, name@x,y a point inside that pad or via, vN(x,y) a via of type N, cw(c..) or ccw(c..) an arc to the next point about the centre after c; other vN are vias at no path point)
+3V3: C1.1 C3.2 C4.2 C5.1 C6.1 C7.1 C15.1 C17.2 C18.1 C23.1 C25.2 C26.2 C27.2 C28.2 C29.2 C30.2 C31.2 C32.2 C33.2 C42.1 C47.1 C49.1 C50.2 C52.1 C53.1 C54.2 D4.2 JP1.1 L1.2 LED3.2 LED4.2 LED5.2 LED6.2 LED7.2 MOD1.7 MOD2.5 R2.2 R4.1 R12.1 R15.2 R27.2 R36.1 R39.1 R40.2 R45.2 R46.2 R47.2 R48.2 R49.2 R50.2 R51.2 R52.2 R56.2 R57.2 R58.2 R60.2 R61.2 R63.2 R64.2 R65.2 R66.2 R67.2 R68.2 R69.2 R70.2 R71.2 U1.14 U2.9 U2.16 U2.18 U3.16 U4.3 U4.7 U4.8 U5.6 U5.20 U5.30 U5.50 U5.58 U5.63 U5.79 U5.91 U5.96 U6.5 U7.A6 U8.A6 U9.8 U10.5 U11.5 U12.5 X2.C3 X4.1 X5.3 X5.4 X6.3 X6.4 X7.3 X7.4 X9.1 X10.4 X11.4 X12.4 X13.2 | length 1367
  Top Layer w0.15: v1(154,21.4) 155.935,21.4 U7.A6@156.073,21.263 ; v1(166,21.4) 167.935,21.4 U8.A6@168.073,21.263
  Top Layer w0.25: C7.1@84,97.875 84.621,97.254 U2.9@87.012,97.254 ; C5.1@86.9,92.375 87.175,92.375 89.262,94.462 U2.16@89.262,95.004 ; U2.18@90.262,95.004 90.262,93.013 C6.1@90.9,92.375 ; v1(105.7,58.8) 105.7,52 110.025,47.675 R4.1@110.025,45.5 ; U1.14@113.355,26.759 113.355,24.62 C47.1@113.4,24.575 v1(113.4,23.9) ; C30.2@119.875,24 119.975,23.9 v1(120.8,23.9) 120.9,24 U5.63@123.1,24 ; C29.2@119.875,26.5 U5.58@123.1,26.5 124,26.5 125,27.5 U5.50@125,31.9 ; v2(124.3,32) 124.9,32 U5.50@125,31.9 ; v1(125,14.2) 125,11.6 125.4,11.2 v1(125.4,7.55) ; C28.2@125,35.2 U5.50@125,31.9 ; C31.2@126.5,12.875 U5.79@126.5,16.075 ; C32.2@132.5,12.875 U5.91@132.5,16.075 ; v1(134.4,23.9) 134.4,25.1 136.2,26.9 137.3,26.9 137.9,27.5 U5.20@138.9,27.5 C26.2@142.125,27.5 ; v2(134.7,30.4) 135,30.7 U5.30@135,31.9 135,34.825 C27.2@135.4,35.225 ; C33.2@135,12.875 U5.96@135,16.075 ; v1(135.8,23.9) 136.25,23.45 136.25,20.31 136.81,19.75 137.29,19.75 138.04,20.5 U5.6@138.9,20.5 C25.2@142.125,20.5
  Top Layer w0.5: U6.5@4.425,107.45 4.925,106.95 C42.1@4.925,105.4 R49.2@4.925,103.4 4.925,101.825 v3(4.9,101.8) ; X12.4@9.905,17.45 9.9,17.455 v2(9.9,19) 9.9,26.4 14.375,30.875 R61.2@15,30.875 R60.2@17,30.875 ; X10.4@32.38,31 32.4,30.98 v1(32.4,21.4) v2(32.4,7.6) ; R36.1@36.5,101.625 C15.1@38.5,101.625 ; v3(39.3,100.1) 39.3,100.825 C15.1@38.5,101.625 ; U3.16@41.6,102.05 38.925,102.05 C15.1@38.5,101.625 ; R56.2@54,29.125 R57.2@56,29.125 v1(56,21.4) v2(56,7.6) ; v3(55.4,111.8) 56.925,111.8 C49.1@57,111.875 59.17,111.875 U9.8@59.595,112.3 59.595,114.255 D4.2@58.95,114.9 ; R63.2@70,91.875 70.275,91.875 70.275,97.675 v2(70.9,98.3) 71.475,98.875 R12.1@72,98.875 R48.2@74,98.875 ; X11.4@71.38,31 71.4,30.98 v2(71.4,7.6) ; R58.2@74.125,101.5 74.125,99 R48.2@74,98.875 ; R15.2@76,98.875 R48.2@74,98.875 ; v2(82.6,98.3) 83.575,98.3 C7.1@84,97.875 ; v3(85.4,86.7) 85.4,91.5 86.275,92.375 C5.1@86.9,92.375 87.775,91.5 90,91.5 90.875,92.375 C6.1@90.9,92.375 ; v2(90.6,7.6) 90.9,7.9 v1(90.9,21.4) 90.9,22.025 C23.1@92,23.125 ; C23.1@91.975,23.1 C23.1@92,23.125 ; v2(93.8,7.6) 93.5,7.9 93.5,13.8 95.275,15.575 R40.2@95.9,15.575 R40.2@95.875,15.6 ; v3(99.2,100.6) 102.67,100.6 X4.1@103.23,100.04 ; X7.4@99.91,39.46 99.91,32.41 99.13,31.63 99.13,26.13 ; U4.3@101.752,26.13 99.13,26.13 ; v2(121,56) 121,40.3 v2(123.2,38.1) ; v2(122.3,32) 122.3,37.2 v2(123.2,38.1) ; U12.5@127.825,39.45 127.75,39.525 C54.2@125.9,39.525 124.625,39.525 v2(123.2,38.1) ; v2(132.1,23.9) 132.1,24.8 134.7,27.4 v2(134.7,30.4) ; v2(133.4,38.1) L1.2@133.4,36.975 134.275,36.1 134.7,36.1 135.4,35.4 C27.2@135.4,35.225 ; LED7.2@142.125,2.5 142.125,1.875 142.8,1.2 149.2,1.2 ; v3@147.125,101.6 R2.2@147.125,112 C4.2@147.125,114 ; v2(149.1,30.4) U10.5@149.975,30.4 151.025,30.4 C50.2@151.9,31.275 v2(151.9,32.5) ; LED6.2@149.125,2.5 149.125,1.275 149.2,1.2 ; R71.2@156,35.925 156.125,35.925 157.875,37.675 C52.1@158,37.675 159.495,37.675 JP1.1@160.6,36.57 ; LED5.2@156.125,2.5 156.125,1.225 156.1,1.2 ; U11.5@160.575,31.25 160.125,31.25 v2(158.875,32.5) C53.1@158.075,33.3 158.075,33.775 160.6,36.3 JP1.1@160.6,36.57 ; LED4.2@163.125,2.5 163.125,1.225 163.1,1.2 ; X13.2@163.17,42.05 163.17,39.14 JP1.1@160.6,36.57 ; v3(166.8,5.7) 166.8,1.2 ; LED3.2@170.125,2.5 168.825,1.2 166.8,1.2 ; R27.2@185.875,5 189.375,8.5 196.5,8.5 ; 196.4,18.4 196.4,8.6 196.5,8.5 ; C1.1@199.2,22 C1.1@200,22 ; R39.1@201.86,5.605 201.465,6 X9.1@199,6 196.5,8.5 ; C23.1@92,23.125 92.425,23.125 v2(93.2,23.9) 93.51,23.59 U4.8@95.252,23.59 U4.7@95.252,24.86 97.86,24.86 99.13,26.13 ; 149.2,1.2 156.1,1.2 ; 156.1,1.2 163.1,1.2 ; 163.1,1.2 166.8,1.2
  Top Layer w1: v3(17.4,98.8) 17.4,100.94 X2.C3@17.46,101 ; v3(39.3,100.1) v3(47.525,91.875) R45.2@50,91.875 R46.2@52,91.875 R47.2@54,91.875 R50.2@56,91.875 R70.2@58,91.875 R69.2@60,91.875 R66.2@62,91.875 R68.2@64,91.875 R65.2@66,91.875 R67.2@68,91.875 R63.2@70,91.875 ; R63.2@70.275,91.875 R64.2@72,91.875 R52.2@74,91.875 R51.2@76,91.875 77.125,91.875 78,91 v3(78,86.7)
  Top Layer w1.8: X7.4@99.91,39.46 X5.3@99.91,84.54
  Top Layer w2.5: MOD2.5@146.08,61.14 145.6,60.66 145.6,55.3 148.9,52 C18.1@148.9,49 ; v4(185.6,18.1) 196.1,18.1 196.4,18.4 C1.1@200,22 203.3,25.3 203.3,33.45 MOD1.7@201.75,35
  Signal Layer 1 w0.15: v1(154,21.4) v1(166,21.4)
  Signal Layer 2 w0.15: v1(32.4,21.4) v1(154,21.4)
  Signal Layer 2 w0.25: v2(93.2,23.9) v1(113.4,23.9) v1(120.8,23.9) v2(132.1,23.9) ; v1(125,14.2) 125.075,14.125 126.225,14.125 v1(126.5,14.4) v1(135,14.4)
  Signal Layer 2 w0.5: v2(9.9,19) 9.9,14.6 16.3,8.2 20.7,8.2 21.3,7.6 v2(32.4,7.6) v2(56,7.6) v2(71.4,7.6) v2(90.6,7.6) v2(93.8,7.6) 107.163,7.6 107.913,6.85 112.187,6.85 112.887,7.55 v1(125.4,7.55) 131.55,7.55 132.4,6.7 165.8,6.7 v3(166.8,5.7) 167.8,6.7 173,6.7 179.1,12.8 182.3,12.8 185.6,16.1 v4(185.6,18.1) ; v3(39.3,100.1) 40.7,101.5 45.1,101.5 v3(55.4,111.8) ; v2(70.9,98.3) v2(82.6,98.3) 85.5,98.3 85.6,98.4 86.2,98.4 87.2,97.4 91.6,97.4 94.8,100.6 v3(99.2,100.6) ; X4.1@103.23,100.04 104.79,101.6 v3(147.1,101.6) ; v2(122.3,32) v2(124.3,32) 133.1,32 v2(134.7,30.4) v2(149.1,30.4) 175.2,30.4 185.6,20 v4(185.6,18.1) ; v2(123.2,38.1) v2(133.4,38.1) ; v2(132.1,23.9) v1(134.4,23.9) v1(135.8,23.9) ; v2(151.9,32.5) v2(158.875,32.5) ; 176.4,18.1 176.4,23.9 179.8,23.9 v4(185.6,18.1) ; 176.4,18.1 176.4,14.4 181.9,14.4 v4(185.6,18.1) ; 176.4,18.1 v4(185.6,18.1)
  Signal Layer 2 w1: v3(4.9,101.8) 7.9,98.8 v3(17.4,98.8) 30,98.8 36.925,91.875 v3(47.525,91.875) ; v3(78,86.7) v3(85.4,86.7) 97.75,86.7 X5.3@99.91,84.54
  Signal Layer 2 w2.5: X7.3@99.91,44.54 99.91,53.01 v1(105.7,58.8) 108.04,61.14 112.76,61.14 117.9,56 v2(121,56) 140.94,56 MOD2.5@146.08,61.14 149.62,57.6 179.15,57.6 MOD1.7@201.75,35
  other v1: 132.5,14.4
+5V: C8.1 C9.1 C12.1 C13.1 J1.4 J3.4 MOD1.4 MOD2.7 R32.2 X5.1 X5.2 X6.1 X6.2 X7.1 X7.2 | length 312.3
  Top Layer w0.5: R32.2@178.875,5 179.6,5 183.6,9 183.6,20.4 185.2,22 C9.1@186,22
  Top Layer w1: X5.1@102.45,84.54 102.45,86.05 110.9,94.5 v3(110.9,112.3)
  Top Layer w1.8: X7.2@102.45,39.46 X5.1@102.45,84.54
  Top Layer w2.5: MOD2.7@125.76,61.14 MOD2.7@126.56,61.14 ; C12.1@128.9,49 132.2,52.3 132.2,55.5 MOD2.7@126.56,61.14 ; C9.1@186,22 185.2,22.8 185.2,34.3 MOD1.4@184.5,35 184.5,42.3 161.7,65.1 130.52,65.1 MOD2.7@126.56,61.14
  Signal Layer 2 w1: J3.4@45.206,121.58 47.486,119.3 62.9,119.3 69.7,126.1 76.2,126.1 77.4,124.9 J1.4@77.4,124.2 82.4,124.2 85.1,126.9 106.6,126.9 108.5,125 108.5,114.7 v3(110.9,112.3)
  Signal Layer 2 w2.5: X6.1@102.45,64.54 114.56,64.54 117.96,61.14 MOD2.7@125.76,61.14
A0: U5.19 X5.43 X6.43 X7.43 | length 169.9
  Top Layer w0.15: U5.19@138.9,27 140.8,27 141.6,26.2 143.1,26.2 v1(146,23.3)
  Top Layer w0.25: v1(49.1,23.4) 49.1,37.5 50.4,38.8 50.4,41.6 49.11,42.89 49.11,46.11 50.4,47.4 50.4,61.4 49.11,62.69 49.11,66.11 50.4,67.4 50.4,80.84 49.11,82.13 X5.43@49.11,84.54
  Signal Layer 1 w0.15: v1(49.1,23.4) v1@145.9,23.4
  Signal Layer 2 w0.15: v1@145.9,23.4 v1(146,23.3)
A1: U5.18 U7.A3 U8.A3 X5.45 X6.45 X7.45 | length 203.4
  Top Layer w0.125: v1(154,19) 156.06,19 U7.A3@156.073,19.013 ; v1(166,19) 168.06,19 U8.A3@168.073,19.013
  Top Layer w0.15: U5.18@138.9,26.5 140.7,26.5 141.4,25.8 142.9,25.8 147.3,21.4 v1(147.3,19)
  Top Layer w0.25: X5.45@46.57,84.54 46.57,82.13 47.8,80.9 47.8,67.3 46.57,66.07 46.57,62.63 47.8,61.4 47.8,47.3 46.57,46.07 46.57,42.93 47.8,41.7 v1(47.8,19)
  Signal Layer 2 w0.15: v1(47.8,19) v1(147.3,19) v1(154,19) v1(166,19)
A2: U5.17 U7.A4 U8.A4 X5.47 X6.47 X7.47 | length 202.3
  Top Layer w0.125: v1(154,19.8) 156.035,19.8 U7.A4@156.073,19.763 ; v1(166,19.8) 168.035,19.8 U8.A4@168.073,19.763
  Top Layer w0.15: v1(133.9,19.8) 133.9,22.7 134.8,23.6 134.8,25 135.8,26 U5.17@138.9,26
  Top Layer w0.25: X5.47@44.03,84.54 44.03,82.13 45.3,80.86 45.3,67.4 44.03,66.13 44.03,62.67 45.3,61.4 45.3,47.4 44.03,46.13 44.03,42.87 45.3,41.6 v1(45.3,19.8)
  Signal Layer 2 w0.15: v1(45.3,19.8) v1(133.9,19.8) v1(154,19.8) v1(166,19.8)
A3: U5.9 U7.A5 U8.A5 X5.49 X6.49 X7.49 | length 196.2
  Top Layer w0.125: v1(154,20.6) 155.985,20.6 U7.A5@156.073,20.513 ; v1(166,20.6) 167.985,20.6 U8.A5@168.073,20.513
  Top Layer w0.15: v1(136.7,20.6) 136.7,21 137.7,22 U5.9@138.9,22
  Top Layer w0.25: X5.49@41.49,84.54 41.49,82.13 42.8,80.82 42.8,67.4 41.49,66.09 41.49,62.71 42.8,61.4 42.8,47.4 41.49,46.09 41.49,42.81 42.8,41.5 42.8,38.8 44.3,37.3 v1(44.3,20.6)
  Signal Layer 2 w0.15: v1(44.3,20.6) v1(136.7,20.6) v1(154,20.6) v1(166,20.6)
A4: U5.8 U7.B3 U8.B3 X5.51 X6.51 X7.51 | length 209.6
  Top Layer w0.125: v1(154.4,18.6) 155.897,18.6 155.922,18.625 156.435,18.625 U7.B3@156.823,19.013 ; v1(166.4,18.6) 167.897,18.6 167.922,18.625 168.435,18.625 U8.B3@168.823,19.013
  Top Layer w0.15: U5.8@138.9,21.5 140.6,21.5 142.3,23.2 143,23.2 145.2,21 v1(145.2,18.6)
  Top Layer w0.25: X5.51@38.95,84.54 38.95,82.13 40.2,80.88 40.2,67.4 38.95,66.15 38.95,62.65 40.2,61.4 40.2,47.4 38.95,46.15 38.95,42.85 40.2,41.6 40.2,38.8 41.3,37.7 v1(41.3,18.6)
  Signal Layer 1 w0.15: v1(41.3,18.6) v1(145.2,18.6) v1(154.4,18.6) v1(166.4,18.6)
A5: U5.7 U7.B4 U8.B4 X5.53 X6.53 X7.53 | length 202.6
  Top Layer w0.125: v1(154.4,20.2) 155.873,20.2 155.922,20.15 156.435,20.15 U7.B4@156.823,19.763 ; v1(166.4,20.2) 167.873,20.2 167.922,20.15 168.435,20.15 U8.B4@168.823,19.763
  Top Layer w0.15: v1(137.1,20.2) 137.9,21 U5.7@138.9,21
  Top Layer w0.25: X5.53@36.41,84.54 36.41,82.13 37.7,80.84 37.7,67.4 36.41,66.11 36.41,62.69 37.7,61.4 37.7,47.4 36.41,46.11 36.41,42.89 37.7,41.6 37.7,38.7 38.4,38 v1(38.4,20.2)
  Signal Layer 1 w0.15: v1(38.4,20.2) v1(137.1,20.2) v1(154.4,20.2) v1(166.4,20.2)
A6: U5.4 U7.C3 U8.C3 X5.55 X6.55 X7.55 | length 214.4
  Top Layer w0.125: v1(154.4,17) 154.55,17.15 156.222,17.15 156.435,17.363 156.435,17.638 156.697,17.9 156.973,17.9 157.185,18.113 157.185,18.625 U7.C3@157.573,19.013 ; v1(166.4,17) 166.55,17.15 168.222,17.15 168.435,17.363 168.435,17.638 168.697,17.9 168.973,17.9 169.185,18.113 169.185,18.625 U8.C3@169.573,19.013
  Top Layer w0.15: U5.4@138.9,19.5 140.4,19.5 141.6,18.3 v1(141.6,17)
  Top Layer w0.25: X5.55@33.87,84.54 33.87,82.13 35.1,80.9 35.1,67.4 33.87,66.17 33.87,62.63 35.1,61.4 35.1,47.4 33.87,46.17 33.87,42.83 35.1,41.6 35.1,38.7 35.9,37.9 v1(35.9,17)
  Signal Layer 1 w0.15: v1(35.9,17) v1(154.4,17) v1(166.4,17)